# Altium PCB w5500.PcbDoc
Units mil, origin at the board's own origin, x right, y up, seen from the top; angles counter-clockwise.
Board outline 6000 x 4000 mil, 2 copper layers (Top Layer, Bottom Layer); 37 components, 40 nets, 136 pads, 44 vias.
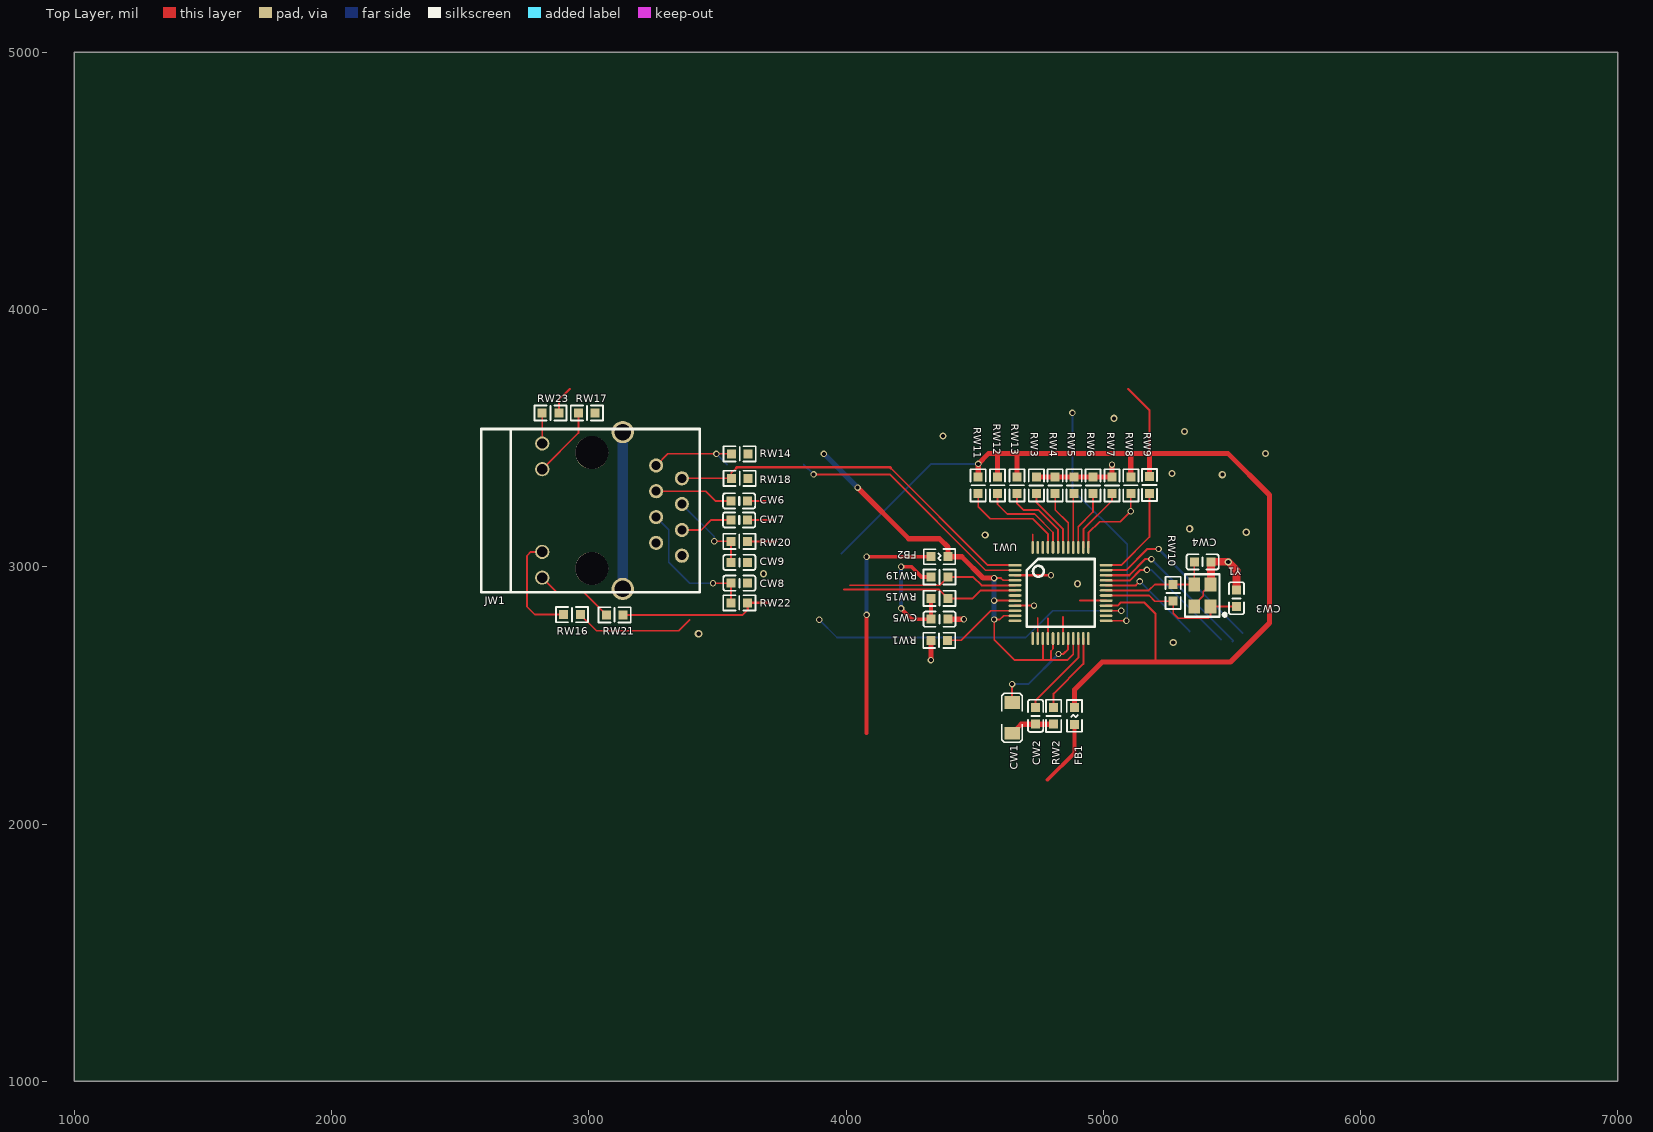
[diagram p0: Top Layer view]
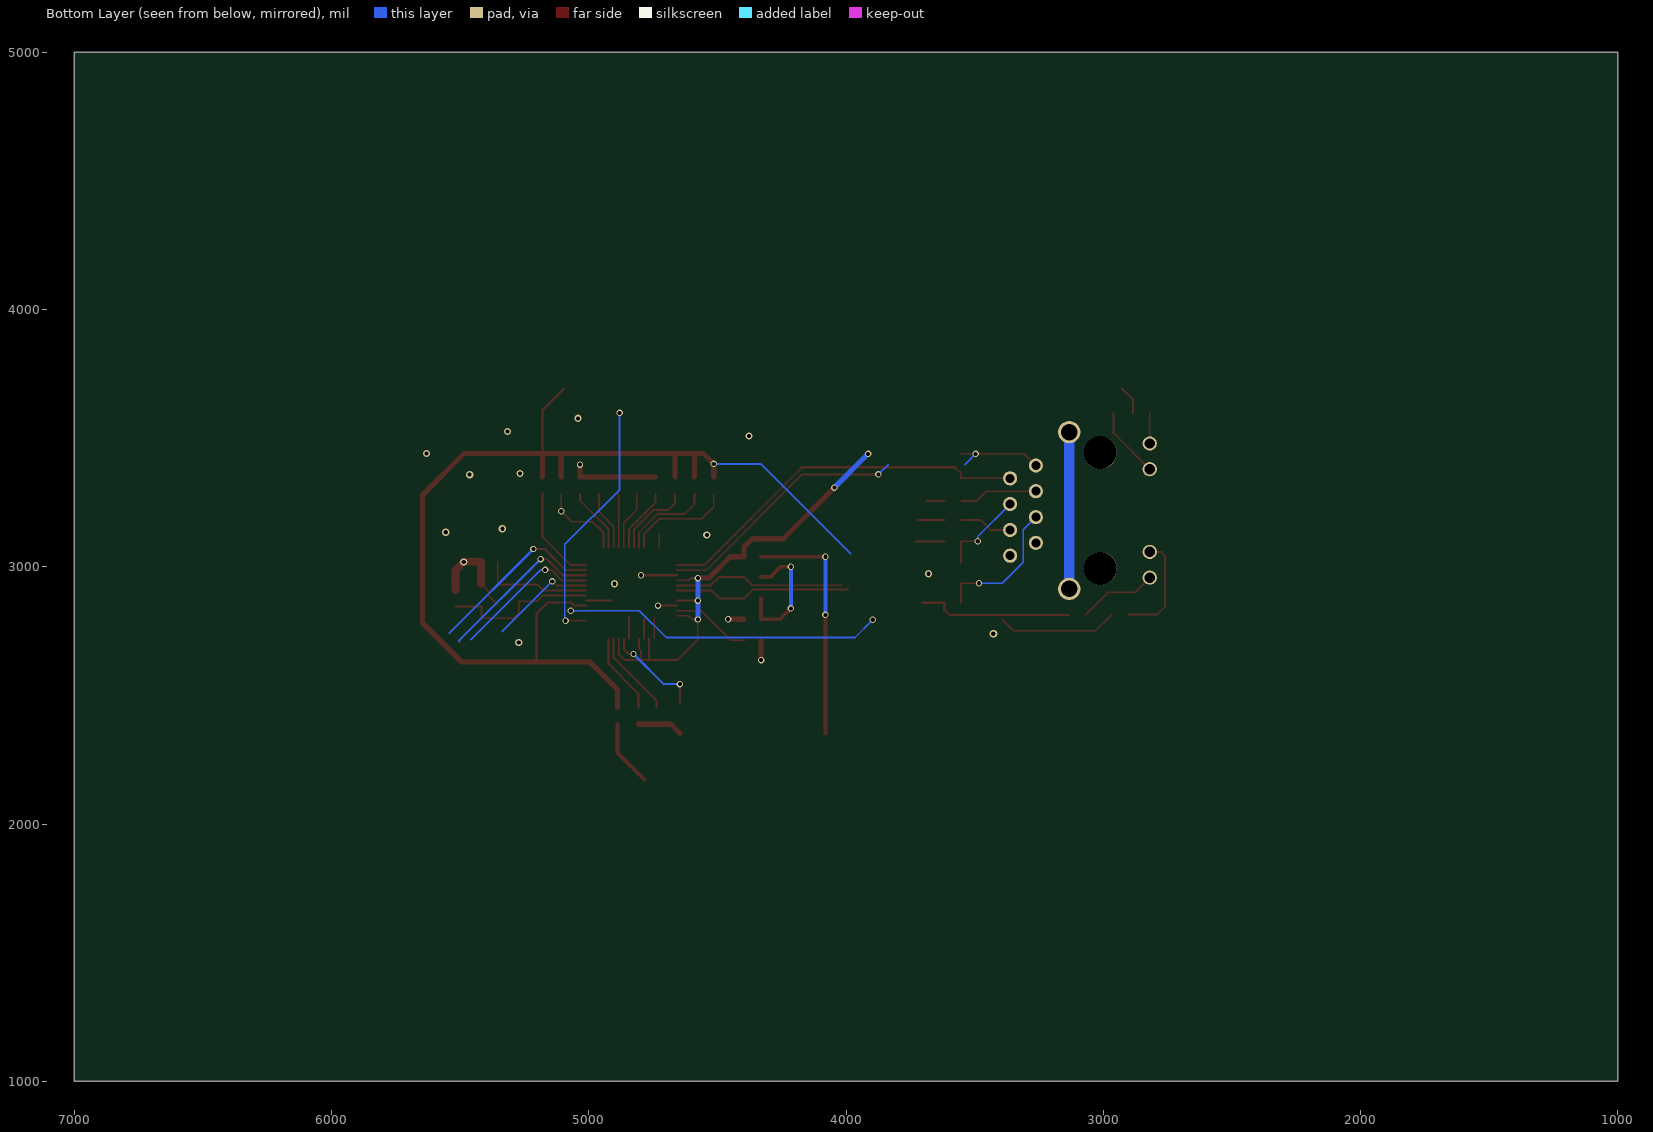
[diagram p1: Bottom Layer view, seen from below]

## Layer stack, top to bottom
Top Solder: solder mask 0.4, Solder Resist, Dk 3.5
Top Layer: signal copper 1.4
Dielectric 1: dielectric 12.6, FR-4, Dk 4.8
Bottom Layer: signal copper 1.4
Bottom Solder: solder mask 0.4, Solder Resist, Dk 3.5

## Board outline
1000,1000 7000,1000 7000,5000 1000,5000

## Design rules (kind name [scope] priority, off if disabled: settings)
Clearance [All] p1: gap=10 ignorepadtopadclearanceinfootprint=FALSE except(0: Arc-Hole Track-Hole SMDPad-Hole THPad-Hole Via-Hole Fill-Hole Poly-Hole Region-Hole Text-Hole)
PolygonConnect [All] p1: connectstyle=Relief reliefconductorwidth=10 reliefentries=4 polygonreliefangle="90 Angle" airgapwidth=10
RoutingVias [All] p1: holewidth=28 width=50 viastyle="Through Hole" minholewidth=28 minwidth=50 maxholewidth=28 maxwidth=50
SolderMaskExpansion [All] p1: expansion=4
Width [All] p1: maxlimit=10 minlimit=10 preferedwidth=10
30 further rules are at their usual default settings.

## Components (designator, comment, footprint, x,y, rotation, side; value= is the part's Value field where it differs from the comment)
CW1 "1206-16V-4.7UF-X5R-K" 1206C 4646,2473 r270 top value=0.1u
CW2 "0603-50V-0.01uF-X7R-K" 0603C 4737,2453 r270 top
CW3 "0603-50V-18pF-C0G-K" 0603C 5518,2910 r270 top value=39pF
CW4 "0603-50V-18pF-C0G-K" 0603C 5419,3019 r180 top value=39pF
CW5 "10n/0603" 0603C 4331,2796 r0 top value=39pF
CW6 "0603-50V-6.8nF-X7R-K" 0603C 3552,3256 r0 top value=39pF
CW7 "0603-50V-6.8nF-X7R-K" 0603C 3552,3182 r0 top value=39pF
CW8 "0603-10NF" 0603C 3553,2936 r0 top value=0603B103J500NT
CW9 "0603-22NF" 0603C 3553,3017 r0 top value=0603B103J500NT
FB1 "0603 31@100MHz" 0603L#1 4888,2420 r90 top value=31Ω
FB2 "0603 31@100MHz" 0603L#2 4331,3039 r0 top value=31Ω
JW1 "HY911105A" HY911105A 2696.54,3218.59 r90 top
RW1 "12.4K/1%/0603" 0603R 4395,2714 r180 top
RW2 "10K/1%/0603" 0603R 4807,2453 r270 top
RW3 "10K/1%/0603" 0603R 4740,3349 r270 top
RW4 "10K/1%/0603" 0603R 4813.33,3349 r270 top
RW5 "10K/1%/0603" 0603R 4886.67,3349 r270 top
RW6 "10K/1%/0603" 0603R 4960,3349 r270 top
RW7 "10K/1%/0603" 0603R 5034,3349 r270 top
RW8 "10K/1%/0603" 0603R 5107,3284 r90 top
RW9 "10K/1%/0603" 0603R 5180,3285 r90 top
RW10 "1M/1%/0603" 0603R 5272,2931 r270 top
RW11 "10K/1%/0603" 0603R 4514,3284 r90 top
RW12 "10K/1%/0603" 0603R 4589,3284 r90 top
RW13 "10K/1%/0603" 0603R 4665,3284 r90 top
RW14 "49R9/1%/0603" 0603R 3554,3439 r0 top
RW15 "82/1%/0603" 0603R 4331,2877 r0 top
RW16 "330 0603 1%" 0603R 2902,2814 r0 top value=1K
RW17 "330 0603 1%" 0603R 2960,3598 r0 top value=1K
RW18 "49R9/1%/0603" 0603R 3554,3344 r0 top
RW19 "82/1%/0603" 0603R 4331,2960 r0 top
RW20 "0603-10-1%" 0603R 3618,3099 r180 top value=1K
RW21 "0603-680-1%" 0603R 3133,2813 r180 top value=1K
RW22 "0603-10-1%" 0603R 3618,2860 r180 top value=1K
RW23 "0603-680-1%" 0603R 2884,3598 r180 top value=1K
UW1 "W5500" LQFP-48 4834.16,2898.16 r90 top locked
Y1 "25M贴片无源晶振 3225" OSC3225_4P 5417,2845 r90 top locked

## Footprints (in the part's own frame and the unit in brackets; to place one, negate y for a bottom-side part, rotate by r counter-clockwise, add the part's x,y. Pads: shape width x height; smd on the part's side, far side on the other; paste and mask are expansions set on the pad)
0603C [mil]
  rect 35x35 smd: 1(0,0) 2(65,0)
  silkscreen extent -30,-30 95,30
0603L#1 [mil]
  rect 35x35 smd: 1(-32.5,0) 2(32.5,0)
  silkscreen extent -62,-29 62,30, body extent -31,-15 32,16, height 16
0603L#2 [mil]
  rect 35x35 smd: 1(0,0) 2(65,0)
  silkscreen extent -29,-29 94,30
0603R [mil]
  rect 35x35 smd: 1(0,0) 2(65,0)
  silkscreen extent -30,-30 95,30
1206C [mil]
  rect 50x60 smd: 1(0,0) 2(120,0)
  silkscreen extent -35,-40 155,40
HY911105A [mm]
  round 3.25 hole 3.25 unplated: 0(-5.715,-8.013) 0(5.715,-8.013)
  round 1.4 hole 0.89: 1(4.45,-14.363) 2(3.18,-16.903) 3(1.91,-14.363) 4(0.64,-16.903) 5(-0.65,-14.363) 6(-1.92,-16.903) 7(-3.19,-14.363) 8(-4.46,-16.903)
  round 1.4 hole 1.02: 9(6.625,-3.113) 10(4.085,-3.113) 11(-4.085,-3.113) 12(-6.625,-3.113)
  round 2.2 hole 1.63: 13(-7.745,-11.063) 14(7.745,-11.063)
  silkscreen extent -8.05,-18.66 8.05,2.91, body extent -7.94,-18.49 7.94,2.91, height 13.5
LQFP-48 [mm]
  rect 0.254x1.27 smd: 1(2.75,4.5)
  oval 0.254x1.27 smd: 2(2.25,4.5) 3(1.75,4.5) 4(1.25,4.5) 5(0.75,4.5) 6(0.25,4.5) 7(-0.25,4.5) 8(-0.75,4.5) 9(-1.25,4.5) 10(-1.75,4.5) 11(-2.25,4.5) 12(-2.75,4.5) 25(-2.75,-4.5) 26(-2.25,-4.5) 27(-1.75,-4.5) 28(-1.25,-4.5) 29(-0.75,-4.5) 30(-0.25,-4.5) 31(0.25,-4.5) 32(0.75,-4.5) 33(1.25,-4.5) 34(1.75,-4.5) 35(2.25,-4.5) 36(2.75,-4.5)
  oval 1.27x0.254 smd: 13(-4.5,2.75) 14(-4.5,2.25) 15(-4.5,1.75) 16(-4.5,1.25) 17(-4.5,0.75) 18(-4.5,0.25) 19(-4.5,-0.25) 20(-4.5,-0.75) 21(-4.5,-1.25) 22(-4.5,-1.75) 23(-4.5,-2.25) 24(-4.5,-2.75) 37(4.5,-2.75) 38(4.5,-2.25) 39(4.5,-1.75) 40(4.5,-1.25) 41(4.5,-0.75) 42(4.5,-0.25) 43(4.5,0.25) 44(4.5,0.75) 45(4.5,1.25) 46(4.5,1.75) 47(4.5,2.25) 48(4.5,2.75)
  silkscreen extent -3.36,-3.36 3.36,3.36
OSC3225_4P [mm]
  rect 1.4x1.15 smd: 1(0,0) 2(2.2,0) 3(2.2,1.6) 4(0,1.6)
  silkscreen extent -1,-1.55 3.2,2.5, body extent -0.5,-0.45 2.7,2.05, height 0.61

## Part data
CW1: library part Cap, "贴片电容", LatestRevisionDate=17-Jul-2002, LatestRevisionNote="Re-released for DXP Platform.", PackageDescription="Radial Cap, Thru-Hole; 2 Leads; 0.3 in Pin Spacing", PackageReference=RAD-0.3, Published=8-Jun-2000, Publisher="Altium Limited"
CW2 CW3 CW4 CW5 CW6 CW7: library part CAP, "Capacitor"
CW8 CW9: library part Cap, "Capacitor", LatestRevisionDate=17-Jul-2002, LatestRevisionNote="Re-released for DXP Platform.", PackageReference=RAD-0.3, Published=8-Jun-2000, Publisher="Altium Limited"
FB1 FB2: library part Inductor, "Inductor", Code_IEC=1005, Code_JEITA=0402, LatestRevisionDate=29-May-2009, LatestRevisionNote="IPC-7351 Footprint Added.", PackageDescription="Chip Inductor", PackageReference=0402-A, Published=8-Jun-2000, Publisher="Altium Limited"
RW1 RW2 RW3 RW4 RW5 RW6 RW7 RW8 RW9 RW11 RW12 RW13 RW14 RW15 RW18 RW19: library part RES1
RW10: library part Res2, "Resistor", LatestRevisionDate=17-Jul-2002, LatestRevisionNote="Re-released for DXP Platform.", Published=8-Jun-2000, Publisher="Altium Limited"
RW16 RW17 RW20 RW21 RW22 RW23: library part Res1, "Resistor", LatestRevisionDate=17-Jul-2002, LatestRevisionNote="Re-released for DXP Platform.", PackageReference=AXIAL-0.3, Published=8-Jun-2000, Publisher="Altium Limited"
Y1: library part OSC5032, "Crystal Oscillator", LatestRevisionDate=17-Jul-2002, LatestRevisionNote="Re-released for DXP Platform.", PackageDescription="Crystal, Thru-Hole; 2 Leads; Body 3.1 x 8.2 mm (Dia.xH)", PackageReference=R38, Published=8-Jun-2000, Publisher="Altium Limited"

## Via types
v1: diameter 25, hole 16, Top Layer to Bottom Layer, tented both sides, 30 vias
v2: diameter 28, hole 16, Top Layer to Bottom Layer, tented both sides, 13 vias
v3: diameter 30, hole 18, Top Layer to Bottom Layer, tented both sides, 1 vias

## Nets (pads, with @x,y where several pads share a name; then routed paths per layer and width w, separated by ;. In a path a pad name is that pad's centre, name@x,y a point inside that pad or via, vN(x,y) a via of type N, cw(c..) or ccw(c..) an arc to the next point about the centre after c; other vN are vias at no path point)
3V3A: FB2.2 RW14.2 RW18.2 UW1.4 UW1.8 UW1.11 UW1.15 UW1.17 UW1.21 | length 1956.5
  Top Layer w6: 4765.27,2638.73 4766,2638 ; 4797,2638 4797,2673 4804.64,2680.64 UW1.17
  Top Layer w7: v1(4576,2868.63) UW1.8 ; v1(4576,2956) 4602,2956 4610.63,2947.37 UW1.4 ; UW1.11 4612.57,2809.57 4598,2795 v1(4576,2795) 4576,2716 4654,2638 4766,2638 4797,2638 4862,2638 4883.38,2659.38 UW1.21 ; 4765.27,2638.73 UW1.15
  Top Layer w20: v1(4045,3308) 4244,3109 4364,3109 4396,3077 FB2.2 4450,3039 4533,2956 v1(4576,2956)
  Bottom Layer w20: v1(3914,3439) v1(4045,3308) ; v1(4576,2795) v1(4576,2868.63) v1(4576,2956)
3V3D: FB1.2 RW8.2 RW9.2 RW11.2 RW12.2 RW13.2 RW20.1 RW21.1 RW22.1 RW23.1 UW1.28 | length 5259.7
  Top Layer w8: RW23.1 2884,3649 2926,3691 ; RW21.1 3598,2813 3618,2833 RW22.1 3703,2860 ; RW20.1 3729,3099 ; UW1.28 5055.94,2848.95 5068,2861 5160,2861 5203,2818 5203,2630 ; 5097,3691 5180,3608 5180,3441 5180,3440
  Top Layer w20: RW11.2 v1(4514,3400) 4555,3441 4591,3441 ; RW12.2 4589,3439 4591,3441 ; RW13.2 4665,3435 4659,3441 ; FB1.2 4888,2522 4996,2630 5203,2630 5495,2630 5646,2781 5646,3279 5484,3441 5180,3441 5109,3441 ; RW8.2 5107,3439 5109,3441 ; RW9.2 5180,3440 ; 4591,3441 4659,3441 ; 4659,3441 5109,3441
  Bottom Layer w8: 3983,3052 4331,3400 v1(4514,3400)
DGND: CW1.2 CW2.2 CW3.1 CW4.1 CW5.2 CW8.2 CW9.2 JW1.8 RW1.2 RW2.2 RW3.1 RW4.1 RW5.1 RW6.1 RW7.1 UW1.3 UW1.9 UW1.14 UW1.16 UW1.19 UW1.29 UW1.48 Y1.2 Y1.4 | length 1648
  Top Layer w7: UW1.48 4725.9,3126.1 ; UW1.14 4745.58,2801.58 ; UW1.16 4784.95,2799.95 ; UW1.19 4844.01,2805.01 ; 4908.37,2868.63 UW1.29 ; Y1.4@5354.01,2852.19 5389,2887.18 5389,2903.61 Y1.2
  Top Layer w8: UW1.9 v1(4730.94,2848.95) ; UW1.3 v1(4797.06,2967.05)
  Top Layer w20: v1(4330,2637) RW1.2 ; CW5.2 v1(4458,2796) ; CW1.2 4681,2388 CW2.2 RW2.2 ; RW3.1 RW4.1 RW5.1 RW6.1 RW7.1 v1(5034,3397)
  Top Layer w30: Y1.2@5419,2933.61 CW4.1 v2(5486,3019) 5518,2987 CW3.1
nACTLED: RW16.2 UW1.27 | length 1773.3
  Top Layer w7: RW16.2 3030,2751 3349,2751 3392,2794 ; UW1.27 5011.59,2829 v1(5070,2829)
  Bottom Layer w7: v1(3896,2794) 3965,2725 4699,2725 4803,2829 v1(5070,2829)
NET0_LED1: JW1.11 RW16.1 | length 418
  Top Layer w7: JW1.11 2774.76,3057.76 2760,3043 2760,2845 2791,2814 RW16.1
NET0_LED2: JW1.10 RW17.1 | length 277
  Top Layer w7: JW1.10 2960,3520.33 RW17.1
NET_MISO: UW1.34 | length 654.3
  Top Layer w8: UW1.34 5101.06,2967.05 5164,3030 v1(5187,3030)
  Bottom Layer w8: v1(5187,3030) 5505,2712 5503,2710
NET_MOSI: UW1.35 | length 700.2
  Top Layer w8: UW1.35 5088.74,2986.74 5171,3069 v1(5215,3069)
  Bottom Layer w8: v1(5215,3069) 5542,2742
NET_NSCLK: UW1.33 | length 576.5
  Top Layer w8: UW1.33 5104.37,2947.37 5145,2988 v1(5170,2988)
  Bottom Layer w8: v1(5170,2988) 5187,2988 5458.54,2716.46
NET_NSS: UW1.32 | length 411.5
  Top Layer w8: UW1.32 5126.31,2927.68 v1(5142,2943.37)
  Bottom Layer w8: v1(5142,2943.37) 5336,2749.37
NetCW1_1: CW1.1 UW1.20 | length 386.2
  Top Layer w8: CW1.1 v1(4646,2544) ; v1(4826,2661) 4845,2661 4863.69,2679.69 UW1.20
  Bottom Layer w8: v1(4646,2544) 4709,2544 v1(4826,2661)
NetCW2_1: CW2.1 UW1.22 | length 336.8
  Top Layer w8: CW2.1 4737,2481 4903.06,2647.06 UW1.22
NetCW3_2: CW3.2 RW10.2 UW1.30 Y1.1 | length 609.9
  Top Layer w7: UW1.30 5178.69,2888.32 5201,2866 RW10.2 5272,2820 5292,2800 5408,2800 5417,2809 Y1.1 CW3.2
NetCW4_2: CW4.2 RW10.1 UW1.31 Y1.3 | length 439
  Top Layer w7: UW1.31 5177,2908 5200,2931 RW10.1 Y1.3@5353.39,2931 ; Y1.3 CW4.2
NetCW5_1: CW5.1 RW15.1 RW19.1 | length 511
  Top Layer w15: v1(4214,2838) 4256,2796 CW5.1 RW15.1 ; v1(4214,3000) 4254,3000 4294,2960 RW19.1
  Bottom Layer w15: v1(4214,2838) v1(4214,3000)
NetCW6_1: CW6.1 JW1.3 | length 305.7
  Top Layer w7: JW1.3 3454.21,3293.79 3492,3256 CW6.1
NetCW7_1: CW7.1 JW1.6 | length 206.2
  Top Layer w7: JW1.6 3437,3143 3476,3182 CW7.1
NetCW8_1: CW8.1 JW1.5 RW22.2 | length 547.8
  Top Layer w7: v1(3483,2936) CW8.1 RW22.2
  Bottom Layer w7: JW1.5 3311,3144 3311,3017 3392,2936 v1(3483,2936)
NetCW9_1: CW9.1 JW1.4 RW20.2 | length 344
  Top Layer w7: v1(3488,3099) RW20.2 CW9.1
  Bottom Layer w7: JW1.4 3488,3117.79 v1(3488,3099)
NetJW1_9: JW1.9 RW23.2 | length 118.6
  Top Layer w7: RW23.2 2819.09,3597.91 JW1.9
NetJW1_12: JW1.12 RW21.2 | length 308.9
  Top Layer w7: JW1.12 2875.85,2901 2980,2901 RW21.2
NetRW1_1: RW1.1 UW1.10 | length 309.7
  Top Layer w7: RW1.1 4448,2714 4563.26,2829.26 UW1.10
NetRW2_1: RW2.1 UW1.23 | length 315.9
  Top Layer w8: RW2.1 4807,2507 4922.75,2622.75 UW1.23
NetRW3_2: RW3.2 UW1.42 | length 251.8
  Top Layer w7: RW3.2 4740,3250 4844.01,3145.99 UW1.42
NetRW4_2: RW4.2 UW1.41 | length 229.5
  Top Layer w7: RW4.2 4813.33,3220.67 4863.69,3170.31 UW1.41
NetRW5_2: RW5.2 UW1.40 | length 210
  Top Layer w7: UW1.40 4883.38,3280.71 RW5.2
NetRW6_2: RW6.2 UW1.39 | length 232.3
  Top Layer w7: UW1.39 4903.06,3156.06 4960,3213 RW6.2
NetRW7_2: RW7.2 UW1.38 | length 254.8
  Top Layer w7: UW1.38 4922.75,3145.75 5034,3257 RW7.2
NetRW9_1: RW9.1 UW1.36 | length 383.1
  Top Layer w7: UW1.36 5070.43,3006.43 5180,3116 RW9.1
NetRW11_1: RW11.1 UW1.45 | length 417.6
  Top Layer w7: RW11.1 4514,3234 4561,3187 4726,3187 4784.95,3128.05 UW1.45
NetRW12_1: RW12.1 UW1.44 | length 360.1
  Top Layer w7: RW12.1 4589,3243 4627,3205 4733,3205 4804.64,3133.36 UW1.44
NetRW13_1: RW13.1 UW1.43 | length 308.6
  Top Layer w7: RW13.1 4665,3245 4689,3221 4747,3221 4824.32,3143.68 UW1.43
nLINKLED: RW17.2 UW1.25 | length 976.2
  Top Layer w7: UW1.25 5011.44,2790 v1(5090,2790)
  Bottom Layer w7: v1(4880,3598) 4880,3300 5093,3087 5093,2793 v1(5090,2790)
PG: JW1.13 JW1.14 | length 609.8
  Bottom Layer w40: JW1.13 JW1.14
RD+: CW6.2 RW19.2 UW1.5 | length 738.6
  Top Layer w7: CW6.2 3688,3256 ; 4016,2928 4364,2928 RW19.2 4495,2960 4527.31,2927.68 UW1.5
RD-: CW7.2 RW15.2 UW1.6 | length 797.3
  Top Layer w7: CW7.2 3721,3182 ; 3991,2912 4361,2912 RW15.2 4493,2877 4524,2908 UW1.6
RST_W5500: RW8.1 UW1.37 | length 323.7
  Top Layer w7: UW1.37 4942.43,3131.43 4986,3175 5066,3175 v1(5107,3216) RW8.1
TD+: JW1.1 RW14.1 UW1.2 | length 1361.1
  Top Layer w7: JW1.1 3307.21,3439 v1(3496,3439) RW14.1 ; v1(3874,3359) 4170,3359 4542.26,2986.74 UW1.2
  Bottom Layer w7: v1(3496,3439) 3538,3397 ; 3836,3397 v1(3874,3359)
TD-: JW1.2 RW18.1 UW1.1 | length 1482.4
  Top Layer w7: JW1.2 3553.79,3343.79 RW18.1 3554,3365 3573,3384 ; 4174,3384 4551.57,3006.43 UW1.1
  Top Layer w10: 3573,3384 3575.5,3386.5 4171.5,3386.5 4174,3384
V3.3: FB1.1 FB2.1 | length 1194.6
  Top Layer w15: 4080,2354 v1(4080,2813) ; v1(4080,3039) FB2.1 ; 4784,2172 4888,2276 FB1.1
  Bottom Layer w15: v1(4080,2813) v1(4080,3039)
pads on no net: JW1.0 JW1.7 UW1.7 UW1.12 UW1.13 UW1.18 UW1.24 UW1.26 UW1.46 UW1.47
copper on no net:
  other v2: 5272,2706 4900,2934 3679,2973 4541,3123 5556,3134 5336,3148 5463,3358 5267,3363 5631,3440 4377,3508 5316,3526 5042,3577
  other v3: 3427,2740